# Altium PCB PCB.PcbDoc
Units mm, origin at the board's own origin, x right, y up, seen from the top; angles counter-clockwise.
Board outline 61.59 x 53.09 mm, 2 copper layers (Top Layer, Bottom Layer); 39 components, 25 nets, 145 pads, 23 vias.
Unrouted connection lines stored in the file: 2.
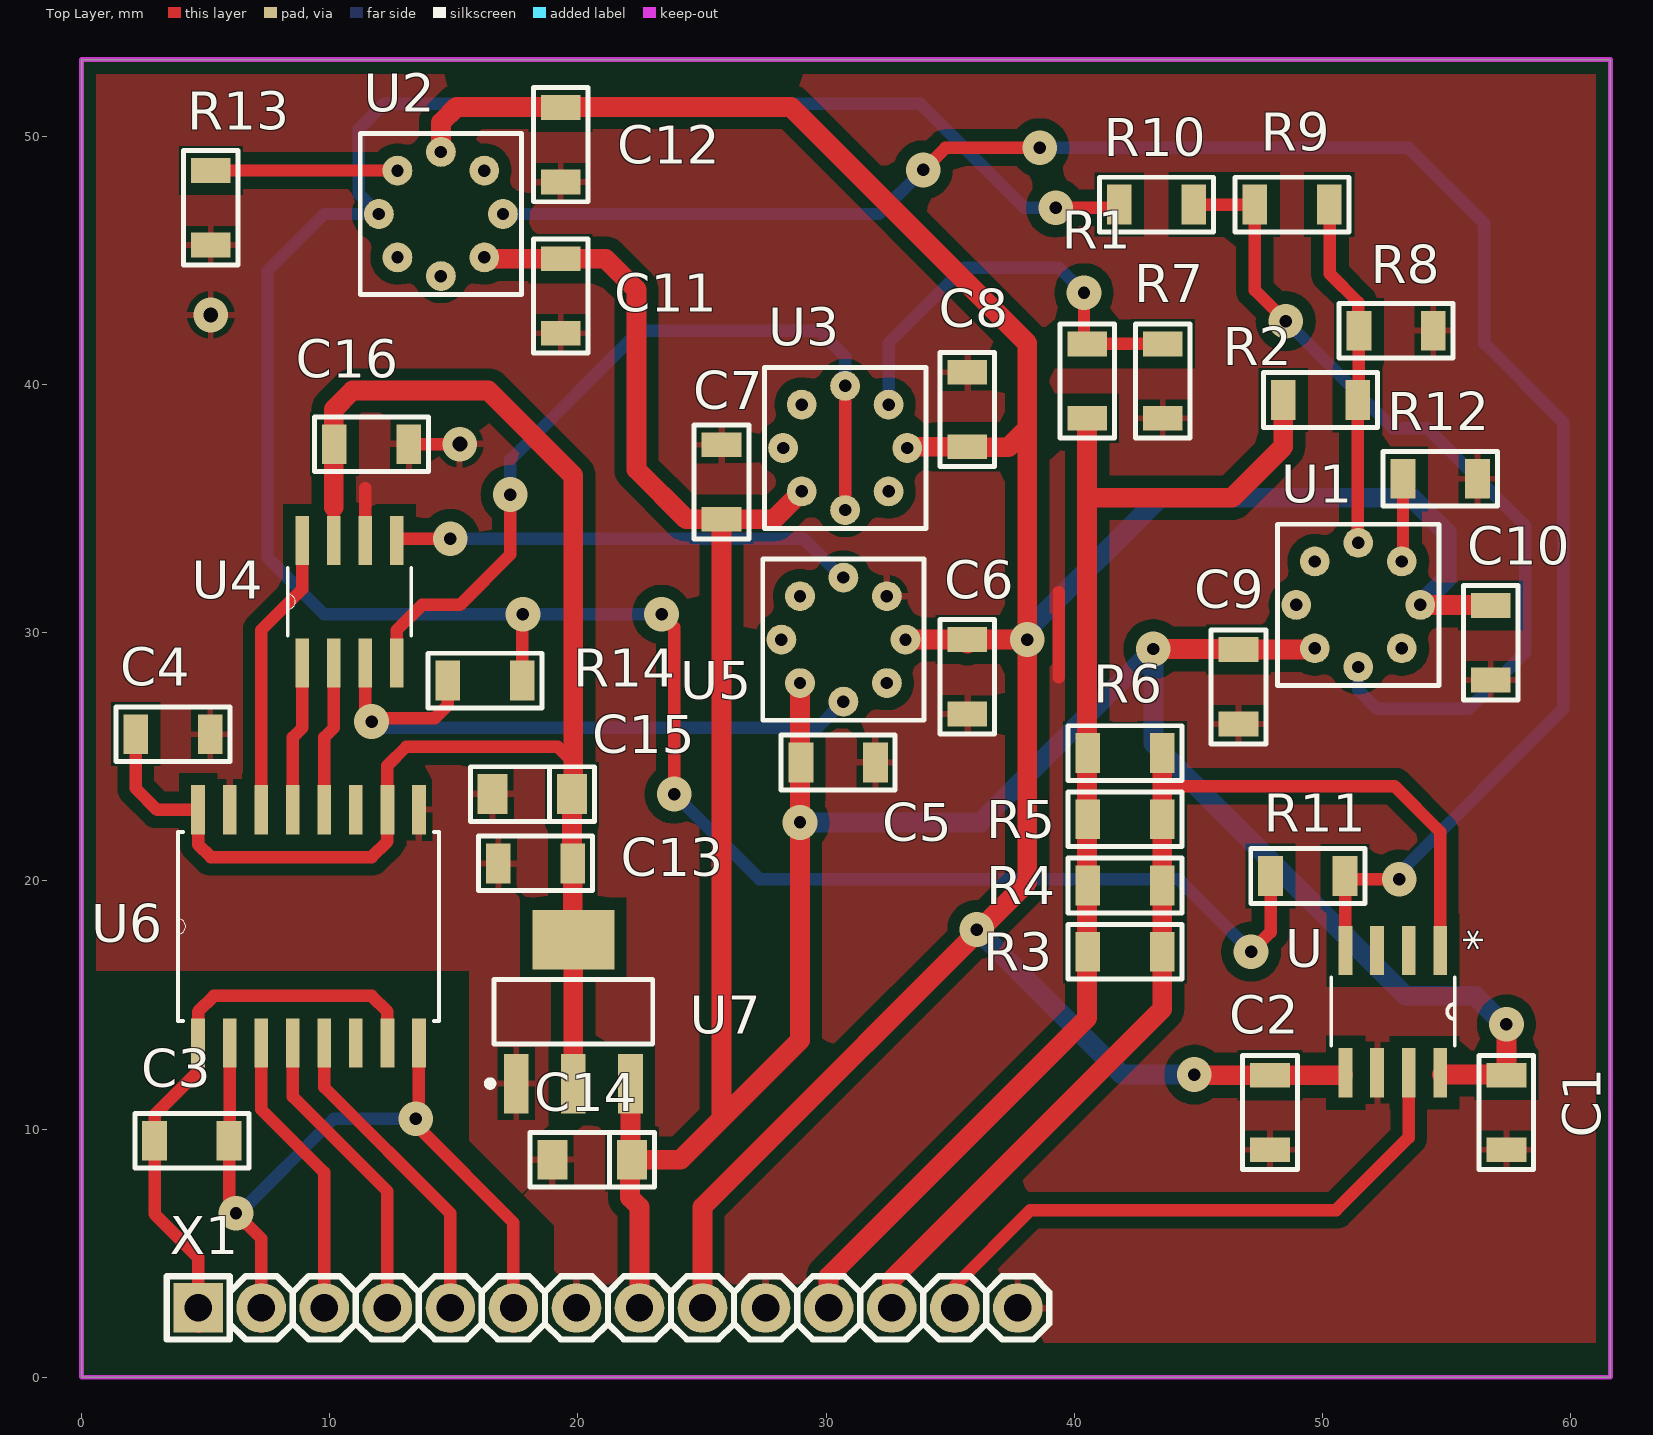
[diagram p0: Top Layer view]
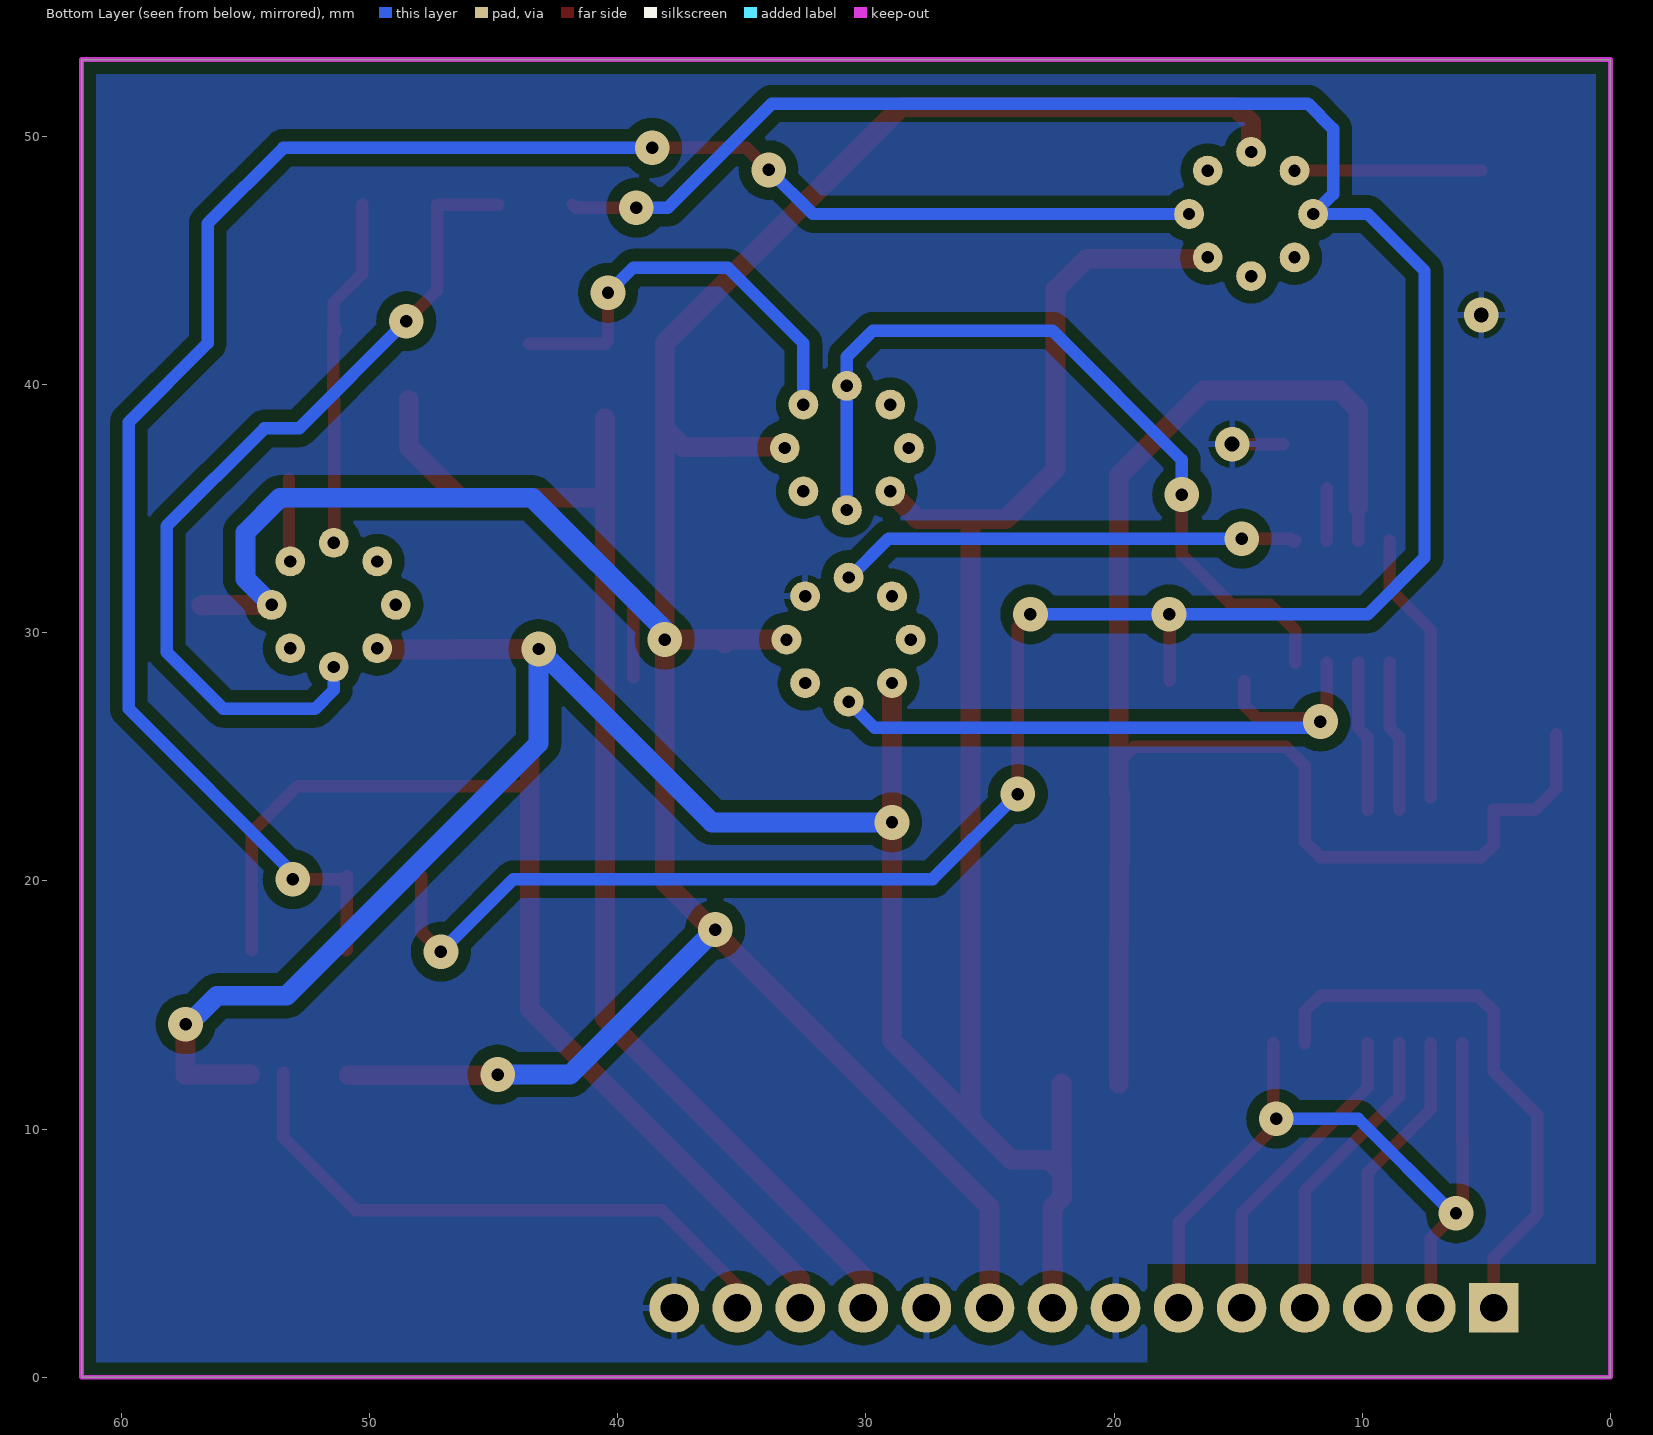
[diagram p1: Bottom Layer view, seen from below]
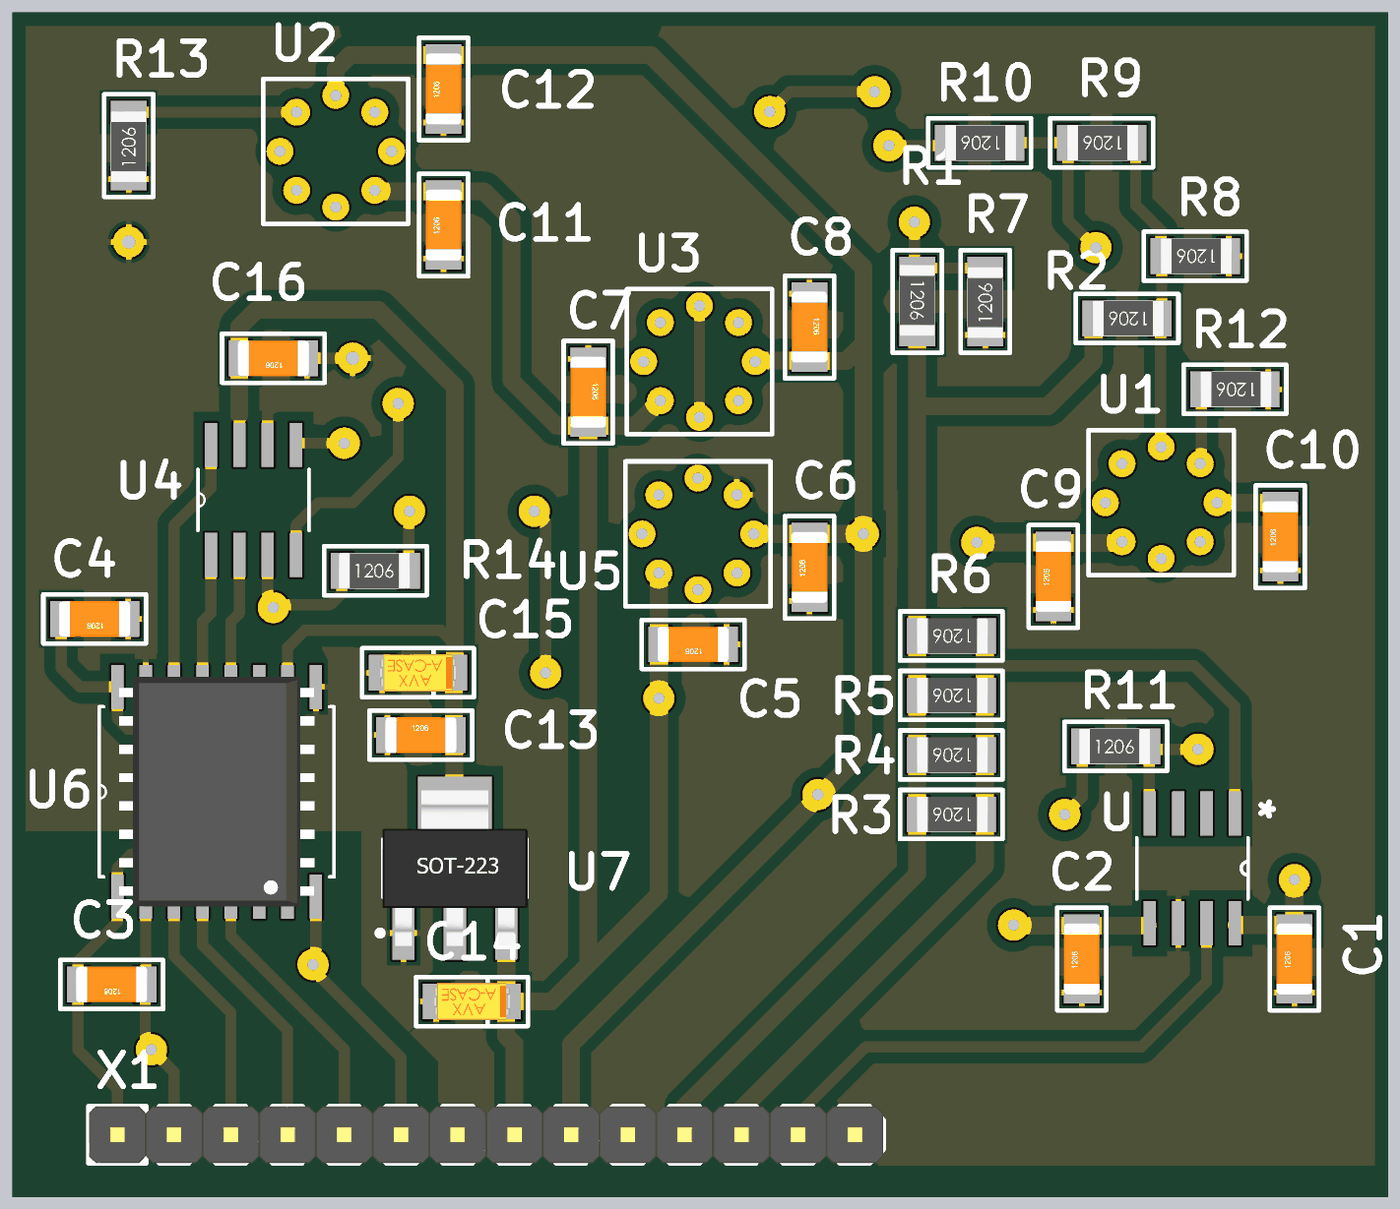
[diagram p2: 3D render of the assembled board from above, using the file's embedded part models]

## Layer stack, top to bottom
Top Solder: solder mask 0.0102, Solder Resist, Dk 3.5
Top Layer: signal copper 0.0356
Dielectric 1: dielectric 0.32, FR-4, Dk 4.8
Bottom Layer: signal copper 0.0356
Bottom Solder: solder mask 0.0102, Solder Resist, Dk 3.5

## Board outline
0,0 0,53.086 61.595,53.086 61.595,0

## Design rules (kind name [scope] priority, off if disabled: settings)
Clearance [All] p1: gap=0.254 ignorepadtopadclearanceinfootprint=TRUE except(0: Arc-Hole Track-Hole SMDPad-Hole THPad-Hole Via-Hole Fill-Hole Poly-Hole Region-Hole Text-Hole; 0.5: Arc-Fill Arc-Poly Arc-Region Track-Fill Track-Poly Track-Region SMDPad-Fill SMDPad-Poly SMDPad-Region THPad-Fill THPad-Poly THPad-Region Via-Fill Via-Poly Via-Region Fill-Fill Fill-Poly Fill-Region Poly-Poly Poly-Region Region-Region)
PolygonConnect [All] p1: connectstyle=Relief reliefconductorwidth=0.254 reliefentries=4 polygonreliefangle="90 Angle" airgapwidth=0.254
RoutingVias [All] p1: holewidth=0.711 width=1.27 viastyle="Through Hole" minholewidth=0.711 minwidth=1.27 maxholewidth=0.711 maxwidth=1.27
SolderMaskExpansion [All] p1: expansion=0.102
Width [All] p1: maxlimit=2 minlimit=0.4 preferedwidth=0.5
30 further rules are at their usual default settings.

## Components (designator, comment, footprint, x,y, rotation, side; value= is the part's Value field where it differs from the comment)
C1 "0.1uF" CH1206C 57.404,10.668 r90 top
C2 "0.1uF" CH1206C 47.879,10.668 r90 top
C3 "0.1uF" CH1206C 4.445,9.525 r180 top
C4 "0.1uF" CH1206C 3.683,25.908 r180 top
C5 "0.1uF" CH1206C 30.48,24.765 r180 top
C6 "0.1uF" CH1206C 35.687,28.218 r90 top
C7 "0.1uF" CH1206C 25.781,36.068 r270 top
C8 "0.1uF" CH1206C 35.687,38.989 r270 top
C9 "0.1uF" CH1206C 46.609,27.813 r90 top
C10 "0.1uF" CH1206C 56.769,29.591 r90 top
C11 "0.1uF" CH1206C 19.304,43.561 r90 top
C12 "0.1uF" CH1206C 19.304,49.657 r90 top
C13 "0.1uF" CH1206C 18.288,20.701 r0 top
C14 "10uF" TANTAL_A 20.574,8.763 r180 top
C15 "10uF" TANTAL_A 18.161,23.495 r180 top
C16 "0.1uF" CH1206C 11.684,37.592 r180 top
R1 "*" CH1206R 40.513,40.132 r270 top
R2 "*" CH1206R 49.911,39.37 r180 top
R3 "*" CH1206R 42.037,17.145 r180 top
R4 "*" CH1206R 42.037,19.812 r180 top
R5 "*" CH1206R 42.037,22.479 r180 top
R6 "*" CH1206R 42.037,25.146 r180 top
R7 "*" CH1206R 43.561,40.132 r90 top
R8 "*" CH1206R 52.959,42.164 r180 top
R9 "*" CH1206R 48.768,47.244 r180 top
R10 "*" CH1206R 43.307,47.244 r180 top
R11 "*" CH1206R 49.403,20.193 r0 top
R12 "*" CH1206R 54.737,36.195 r180 top
R13 "*" CH1206R 5.207,47.117 r90 top
R14 "*" CH1206R 16.256,28.067 r0 top
U "AD8221BR" SOIC127P600X175-8N 52.832,14.732 r270 top
U1 "140УД17А" 140УД17А 51.435,31.115 r90 top
U2 "140УД17А" 140УД17А 14.478,46.863 r180 top
U3 "140УД17А" 140УД17А 30.762,37.437 r90 top
U4 "AD5543BRZ" SOIC127P600X175-8N 10.795,31.242 r90 top
U5 "140УД17А" 140УД17А 30.694,29.718 r90 top
U6 "ADUM1401BRWZ-RL" SOIC127P1032X265-16N 9.144,18.161 r90 top
U7 "Linear voltage regulator, input 3.9...18V, 0.6V, output 3.3V, 1.2A, -40...+85°C, SOT223" SOT223 19.812,14.732 r90 top
X1 "*" "CON: PLS-14" 21.209,2.794 r0 top

## Footprints (in the part's own frame and the unit in brackets; to place one, negate y for a bottom-side part, rotate by r counter-clockwise, add the part's x,y. Pads: shape width x height; smd on the part's side, far side on the other; paste and mask are expansions set on the pad)
140УД17А [mm] "Precision Op Amp"
  round 1.2 hole 0.5: 1(0,2.5) 2(1.75,1.75) 3(2.5,0) 4(1.75,-1.75) 5(0,-2.5) 6(-1.75,-1.75) 7(-2.5,0) 8(-1.75,1.75)
  silkscreen extent -3.25,-3.25 3.25,3.25
CH1206C [mm] "Non polar chip capacitor, size 1206"
  rect 1x1.6 smd: 1(-1.5,0) 2(1.5,0)
  silkscreen extent -2.3,-1.1 2.3,1.1, body extent -1.6,-0.8 1.6,0.8, height 1
CH1206R [mm] "Chip Resistor, 2-Leads, Body 3,0x1,5mm, IPC Low Density"
  rect 1x1.6 smd: 1(-1.5,0) 2(1.5,0)
  silkscreen extent -2.3,-1.1 2.3,1.1, body extent -1.65,-0.8 1.55,0.8, height 0.47
"CON: PLS-14" [mm]
  rect 2x2 hole 1.1: 1(-16.51,0)
  round 2 hole 1.1: 2(-13.97,0) 3(-11.43,0) 4(-8.89,0) 5(-6.35,0) 6(-3.81,0) 7(-1.27,0) 8(1.27,0) 9(3.81,0) 10(6.35,0) 11(8.89,0) 12(11.43,0) 13(13.97,0) 14(16.51,0)
  silkscreen extent -17.78,-1.27 17.78,1.27, body extent -17.78,-1.27 17.78,1.27, height 8.54
SOIC127P600X175-8N [mil]
  rect 78x22 smd: 1(-97,75) 2(-97,25) 3(-97,-25) 4(-97,-75) 5(97,-75) 6(97,-25) 7(97,25) 8(97,75)
  silkscreen extent -54,-98 54,98
SOIC127P1032X265-16N [mil]
  rect 78x22 smd: 1(-185,175) 2(-185,125) 3(-185,75) 4(-185,25) 5(-185,-25) 6(-185,-75) 7(-185,-125) 8(-185,-175) 9(185,-175) 10(185,-125) 11(185,-75) 12(185,-25) 13(185,25) 14(185,75) 15(185,125) 16(185,175)
  silkscreen extent -150,-207 150,207, body extent -203,-203 203,203, height 46
SOT223 [mm] "SOT223, 4-Leads, Body 6,50x7,00mm (avg), Pitch 2,30mm, IPC Medium Density"
  rect 2.4x1 smd: 1(-2.9,2.3) 2(-2.9,0) 3(-2.9,-2.3)
  rect 2.4x3.3 smd: 4(2.9,0)
  round 0.5 on Mech1: ""(-3,2.7)
  silkscreen extent -3.02,-3.2 1.3,3.47, body extent -3.48,-3.25 3.48,3.25, height 1.65
TANTAL_A [mm]
  rect 1.2x1.6 smd: 1(-1.6,0) 2(1.6,0)
  round 0.5 on Mech1: ""(-1.2,0.4)
  silkscreen extent -2.5,-1.1 2.5,1.1, body extent -1.7,-0.84 1.7,0.84, height 1.71

## Part data
C1 C2 C3 C4 C5 C6 C7 C8 C9 C10 C11 C12 C13 C16: library part Capacitor
C14 C15: library part TantalCap
R1 R2 R3 R4 R5 R6 R7 R8 R9 R10 R11 R12 R13 R14: library part Resistor
U: "Instrumentation Amplifier 1 Circuit 8-SOIC", Package="SOIC-8 Analog Devices", Availability=Unavailable, MF="Analog Devices", MP=AD8221BR, Price=None, SnapEDA_Link=https://www.snapeda.com/parts/AD8221BR/Analog%20Devices%20Inc./view-part/82856/?ref=snap
U1 U2 U3 U5: "Precision Op Amp"
U4: "16 Bit Digital to Analog Converter 1 8-SOIC", Package="SOIC-8 Analog Devices", Availability=Good, Check_prices=https://www.snapeda.com/parts/AD5543BRZ/Analog%20Devices%20Inc./view-part/278340/?ref=eda, MF="Analog Devices", MP=AD5543BRZ, Price=None, Purchase-URL=https://pricing.snapeda.com/search/part/AD5543BRZ/?ref=eda, SnapEDA_Link=https://www.snapeda.com/parts/AD5543BRZ/Analog%20Devices%20Inc./view-part/278340/?ref=snap
U6: "General Purpose Digital Isolator 2500Vrms 4 Channel 10Mbps 25kV/Aµs CMTI 16-SOIC (0.295, 7.50mm Width)", Package="SOIC -16 Analog Devices", Availability=Good, Check_prices=https://www.snapeda.com/parts/ADUM1401BRWZ-RL/Analog%20Devices%20Inc./view-part/284352/?ref=eda, MF="Analog Devices", MP=ADUM1401BRWZ-RL, Price=None, Purchase-URL=https://pricing.snapeda.com/search/part/ADUM1401BRWZ-RL/?ref=eda, SnapEDA_Link=https://www.snapeda.com/parts/ADUM1401BRWZ-RL/Analog%20Devices%20Inc./view-part/284352/?ref=snap
U7: library part LDL1117S33R, "Linear voltage regulator", CurrentOutput=1.2A, Manufacturer=STMicroelectronics, Package=SOT223, PartNumber=LM1117GS-5.0, Temperature=-40...+85°C, VoltageInput="input 3.9...18V", VoltageOutput="output 3.3V", ComponentType="Linear voltage regulator", HelpURL=https://www.digikey.com/product-detail/en/stmicroelectronics/LDL1117S33R/497-17239-1-ND/7102079, MaxDropout=0.6V, ValueManufacturerPartNumber="Linear voltage regulator, input 3.9...18V, 0.6V, output 3.3V, 1.2A, -40...+85°C, SOT223"
X1: library part 14-Connector

## Via types
v1: diameter 1.4, hole 0.5, Top Layer to Bottom Layer, 21 vias
v2: diameter 1.4, hole 0.6, Top Layer to Bottom Layer, 2 vias

## Nets (pads, with @x,y where several pads share a name; then routed paths per layer and width w, separated by ;. In a path a pad name is that pad's centre, name@x,y a point inside that pad or via, vN(x,y) a via of type N, cw(c..) or ccw(c..) an arc to the next point about the centre after c; other vN are vias at no path point)
+5V_A: C4.2 C13.2 C15.1 C16.2 U4.7 U6.10 U6.16 U7.2 U7.4 | length 66.9
  Top Layer w0.5: C4.2 2.183,23.725 3.048,22.86 U6.16 4.699,21.463 5.207,20.955 11.684,20.955 12.319,21.59 U6.10 12.319,24.638 13.081,25.4 19.177,25.4 19.812,24.765 ; U4.7 10.16,35.052 ; C13.2@19.761,20.728 C13.2 ; C15.1 C15.1@19.812,23.546 ; U7.4@19.788,17.656 U7.4
  Top Layer w0.8: 10.16,35.052 10.16,38.989 10.922,39.751 16.383,39.751 19.812,36.322 19.812,24.765 C15.1@19.812,23.546 ; C13.2@19.761,20.728 C15.1 ; U7.4@19.788,17.656 C13.2 ; U7.2 U7.4
+5V_D: C3.2 U6.1 U6.7 X1.1 | length 23.6
  Top Layer w0.5: X1.1@4.699,2.032 X1.1 4.699,4.826 2.945,6.58 C3.2 2.945,10.565 4.699,12.319 U6.1 4.699,14.732 5.334,15.367 11.684,15.367 12.319,14.732 U6.7
+15V: C1.2 C5.2 C7.2 C9.2 C11.2 C14.1 U1.8 U2.8 U3.8 U5.8 U7.3 U.8 X1.8 | length 129.7
  Top Layer w0.5: U2.8 U2.8@16.28,45.061 ; C1.2@57.38,12.192 C1.2
  Top Layer w0.8: U2.8@16.28,45.061 C11.2 21.106,45.061 22.352,43.815 22.352,36.576 24.36,34.568 C7.2 ; U7.3 22.112,8.269 22.098,8.283 22.098,7.239 22.479,6.858 X1.8 ; C14.1@22.225,8.382 22.606,8.763 24.13,8.763 25.781,10.414 ; U5.8 v1(28.944,22.352) 28.944,13.577 25.781,10.414 ; U3.8 27.893,34.568 C7.2 ; v1(43.18,29.337) 46.585,29.337 C9.2 49.633,29.313 U1.8 ; U.8@54.813,12.192 C1.2@57.38,12.192 ; C1.2 v1(57.404,14.224) ; 25.781,10.414 C7.2
  Bottom Layer w0.8: v1(28.944,22.352) 36.195,22.352 v1(43.18,29.337) 43.18,25.527 53.34,15.367 56.134,15.367 57.404,14.097 v1(57.404,14.224)
-15V: C2.2 C6.2 C8.2 C10.2 C12.2 U1.5 U2.5 U3.5 U5.5 U.5 X1.9 | length 126.8
  Top Layer w0.5: U2.5 U2.5@14.502,49.387 ; C8.2 C8.2@35.711,37.465
  Top Layer w0.8: U2.5 14.478,50.546 15.113,51.181 28.575,51.181 38.1,41.656 38.1,38.227 ; X1.9 25.019,6.858 38.1,19.939 v1(38.1,29.718) ; U5.5 C6.2 ; U3.5 33.314,37.489 C8.2 ; C6.2@35.687,29.567 35.838,29.718 v1(38.1,29.718) ; C8.2@35.711,37.465 37.338,37.465 38.1,38.227 ; v1@44.982,12.168 C2.2 U.5@50.827,12.168 ; U1.5 56.745,31.115 C10.2 ; v1(38.1,29.718) 38.1,38.227
  Bottom Layer w0.8: v1(36.068,18.034) 41.91,12.192 v1(44.831,12.192) ; v1(38.1,29.718) 38.1,30.099 43.434,35.433 53.594,35.433 54.991,34.036 54.991,32.171 U1.5
GND_A: C1.1 C2.1 C4.1 C5.1 C6.1 C7.1 C8.1 C9.1 C10.1 C11.1 C12.1 C13.1 C14.2 C15.2 C16.1 R7.1 R8.1 R12.1 R13.1 U4.6 U5.4 U6.9 U6.15 U7.1 U.6 X1.7 X1.10 X1.14 | length 7.6
  Top Layer w0.5: U4.6 11.43,35.814 ; C16.1 v2(15.24,37.592) ; 39.37,28.194 39.37,31.623
  other v2: 5.207,42.799
GND_D: C3.1 U6.2 U6.8 X1.2 X1.6 | length 33.8
  Top Layer w0.5: U6.2 5.969,9.549 C3.1 5.945,6.882 v1(6.223,6.604) 7.239,5.588 X1.2 X1.2@7.239,2.032 ; U6.8 13.589,10.033 17.399,6.223 X1.6 X1.6@17.399,2.032
  Bottom Layer w0.5: v1(6.223,6.604) 6.35,6.604 10.16,10.414 v1(13.462,10.414)
NetR1_1: R1.1 R7.2 U3.4 | length 17.2
  Top Layer w0.5: v1(40.386,43.688) 40.386,41.759 R1.1 R7.2
  Bottom Layer w0.5: U3.4 32.512,41.656 35.56,44.704 39.37,44.704 v1(40.386,43.688)
NetR2_1: R2.1 R8.2 R9.1 U1.3 | length 14.2
  Top Layer w0.5: R9.1@50.292,47.244 50.292,44.45 51.435,43.307 51.435,42.267 R8.2@51.332,42.164 ; U1.3 51.411,33.639 R2.1 51.459,39.418 R8.2
NetR3_1: R3.1 R4.1 R5.1 R6.1 U.1 X1.12 | length 43.6
  Top Layer w0.5: 43.537,23.812 52.895,23.812 54.737,21.971 U.1
  Top Layer w0.8: X1.12 32.639,3.937 43.537,14.835 R3.1 R4.1 R5.1 43.537,23.812 R6.1
NetR9_2: R9.2 R10.1 U1.7 | length 34.7
  Top Layer w0.5: R10.1 R9.2 47.268,43.791 v1(48.514,42.545)
  Bottom Layer w0.5: v1(48.514,42.545) 52.832,38.227 54.229,38.227 58.166,34.29 58.166,29.21 55.88,26.924 52.197,26.924 51.435,27.686 U1.7
NetR10_2: R10.2 R11.1 R14.2 U2.3 | length 109.7
  Top Layer w0.5: R14.2 17.756,30.583 v1@17.78,30.607 ; v1(23.368,30.734) 23.876,30.226 v1(23.876,23.495) ; v1(39.243,47.117) 41.68,47.117 R10.2 ; v1(47.117,17.145) 47.903,17.931 R11.1
  Bottom Layer w0.5: v1(23.368,30.734) v1(17.78,30.734) 9.779,30.734 7.493,33.02 7.493,44.577 9.779,46.863 U2.3 11.176,47.665 11.176,50.292 12.192,51.308 33.782,51.308 37.973,47.117 v1(39.243,47.117) ; v1@23.812,23.431 23.939,23.431 27.305,20.066 44.196,20.066 v1(47.117,17.145)
NetR11_2: R11.2 U2.7 U.4 | length 77.6
  Top Layer w0.5: v1(33.909,48.641) 34.798,49.53 v1(38.608,49.53) ; U.4 50.903,17.22 R11.2 51.03,20.066 v1(53.086,20.066)
  Bottom Layer w0.5: U2.7 32.131,46.863 v1(33.909,48.641) ; v1(38.608,49.53) 53.467,49.53 56.515,46.482 56.515,41.656 59.69,38.481 59.69,26.924 53.086,20.32 v1(53.086,20.066)
NetR12_2: R12.2 U1.4 | length 3.4
  Top Layer w0.5: U1.4 53.237,32.917 R12.2
NetR13_2: R13.2 U2.4 | length 7.5
  Top Layer w0.5: R13.2 12.724,48.617 U2.4
NetR14_1: R14.1 U4.3 U5.7 | length 26.8
  Top Layer w0.5: U4.3 11.43,26.797 11.684,26.543 14.224,26.543 14.756,27.075 R14.1
  Bottom Layer w0.5: v1@11.811,26.797 11.811,26.035 11.938,26.162 29.638,26.162 U5.7
  other v1: 11.684,26.416
NetU3_3: U3.3 U3.7 U4.4 | length 38.2
  Top Layer w0.5: U4.4 12.7,30.099 13.716,31.115 15.24,31.115 17.272,33.147 v1(17.272,35.56) ; U3.7 U3.3
  Bottom Layer w0.5: v1(17.272,35.56) 17.272,36.957 22.479,42.164 29.718,42.164 30.762,41.12 U3.3 U3.7
NetU4_1: U4.1 U6.13 | length 6.1
  Top Layer w0.5: U6.13 8.509,25.781 8.89,26.162 U4.1
NetU4_2: U4.2 U6.12 | length 6.1
  Top Layer w0.5: U6.12 9.779,25.781 10.16,26.162 U4.2
NetU4_5: U4.5 U5.3 | length 18.7
  Top Layer w0.5: U4.5 12.751,33.655 12.878,33.782 v1(14.859,33.782)
  Bottom Layer w0.5: v1(14.859,33.782) 29.083,33.782 30.647,32.218 U5.3
NetU4_8: U4.8 U6.14 | length 11
  Top Layer w0.5: U6.14@7.239,23.368 7.239,30.099 8.89,31.75 U4.8
SPI_CS: U6.3 X1.3 | length 12.5
  Top Layer w0.5: U6.3 7.239,10.795 9.779,8.255 X1.3 X1.3@9.779,2.032
SPI_MOSI: U6.5 X1.5 | length 13.5
  Top Layer w0.5: U6.5 9.779,11.684 14.859,6.604 X1.5 X1.5@14.859,2.032
SPI_SCK: U6.4 X1.4 | length 13
  Top Layer w0.5: U6.4 8.509,11.303 12.319,7.493 X1.4 X1.4@12.319,2.032
Ud: U.7 X1.13 | length 25
  Top Layer w0.5: X1.13@35.179,2.032 X1.13 35.179,3.683 38.227,6.731 50.546,6.731 53.467,9.652 U.7
Um: R1.2 R2.2 R3.2 R4.2 R5.2 R6.2 X1.11 | length 58.8
  Top Layer w0.5: R3.2 R4.2 R5.2 R6.2
  Top Layer w0.8: X1.11 30.099,4.064 40.513,14.478 40.513,22.479 40.513,35.433 ; R1.2 40.513,35.433 ; R2.2 48.411,37.489 46.355,35.433 40.513,35.433
pads on no net: C14. C15. U1.1 U1.2 U1.6 U2.1 U2.2 U2.6 U3.1 U3.2 U3.6 U5.1 U5.2 U5.6 U6.6 U6.11 U7. U.2 U.3

## Polygon pours and split planes (outlines as drawn)
GND_A on Top Layer "TL" (solid, pour order 0): 0,53.086 61.595,53.086 61.595,1.397 0,1.397
GND_A on Bottom Layer "BL" (solid, pour order 2): 0,53.086 61.595,53.086 61.595,0 0,0

## Keep-outs
Keep-Out Layer:
  the board outline again, w0.2

## Other copper
Top Layer:
  pour cut-out: 0.381,16.383 15.621,16.383 15.621,9.525 19.05,6.096 19.05,2.201 19.05,0 0.381,0
  pour cut-out: 23.241,8.128 23.368,8.001 24.638,8.001 24.638,3.81 23.876,3.048 23.622,3.048 22.987,3.683 23.114,3.81 23.114,8.128
  pour cut-out: 13.081,32.639 9.525,32.639 8.636,31.75 8.636,30.099 8.763,29.972 12.192,29.972 12.192,30.226 13.716,31.75
  pour cut-out: 13.97,48.641 14.478,48.133 15.875,48.133 15.875,47.244 16.383,46.736 15.367,45.72 15.367,45.339 13.589,45.339 13.462,45.212 12.573,46.101 12.573,47.625 13.589,48.641
  pour cut-out: 30.734,31.496 31.75,31.496 32.766,30.48 32.766,28.956 31.623,27.813 29.591,27.813 28.448,28.956 28.448,30.734 29.464,31.75 30.48,31.75
  pour cut-out: 52.324,32.893 53.467,31.75 53.34,31.623 53.34,30.099 52.959,30.099 51.943,29.083 51.308,29.718 49.784,29.718 49.784,30.353 49.403,30.734 49.53,30.861 49.53,32.258 49.784,32.258 50.419,32.893
  pour cut-out: 18.923,35.56 18.161,34.798 17.526,34.798 17.526,32.766 17.145,32.385 17.526,32.004 19.431,32.004 19.431,34.798 19.304,34.925
  pour cut-out: 13.589,30.48 14.478,31.369 16.51,31.369 16.51,30.607 17.399,29.718 17.272,29.591 17.272,28.321 18.796,26.797 18.796,25.908 15.113,25.908 15.367,26.162 15.367,28.956 13.335,28.956 13.208,29.083
  pour cut-out: 26.289,29.591 26.289,12.954 27.305,12.954 28.321,13.97 28.321,28.829 27.178,29.972
  pour cut-out: 41.148,14.478 41.275,14.605 42.672,14.605 42.672,25.908 42.799,26.035 42.799,26.416 41.148,26.416
Bottom Layer:
  pour cut-out: 29.972,31.496 30.226,31.75 31.75,31.75 32.893,30.607 32.512,30.226 32.512,28.829 32.385,28.829 31.369,27.813 29.972,27.813 28.702,29.083 28.702,30.988 29.21,31.496
  pour cut-out: 30.48,39.37 30.734,39.116 32.258,39.116 32.258,38.354 32.893,37.719 32.131,36.957 32.131,36.068 31.242,36.068 30.734,35.56 30.48,35.814 29.464,35.814 29.464,36.195 28.702,36.957 29.464,37.719 29.464,39.116
  pour cut-out: 13.462,48.895 15.621,48.895 16.764,47.752 16.764,45.72 15.407,44.363 13.549,44.363 12.319,45.593 12.319,47.879
  pour cut-out: 50.419,32.893 52.832,32.893 53.848,31.877 53.848,29.718 52.578,28.448 50.165,28.448 49.276,29.337 49.276,32.258
  pour cut-out: 0,4.572 18.669,4.572 18.669,0 0,0

## Silkscreen, mask and mechanical layers (free items; w line width, h text height)
Size:
  lines w0.254: -0.041,-3.785 -0.041,-3.277 ; 1.483,-4.039 -0.041,-3.531 ; 1.483,-3.023 -0.041,-3.531 ; 22.86,-3.531 -0.041,-3.531 ; 38.654,-3.531 61.554,-3.531 ; 60.03,-4.039 61.554,-3.531 ; 60.03,-3.023 61.554,-3.531 ; 61.554,-3.785 61.554,-3.277
  text "61.595 (mm)" at 23.114,-4.445 h1.52

## Dimensions
61.595,0 to 61.595,53.086 on Size

## Text inside footprints (layer, text, board x,y; h text height)
U: Top Overlay "*" at 55.172,18.039 h1.27 r270; Mechanical 13 "*" at 55.172,18.038 h1.27 r270
U6: Mechanical 13 "*" at 4.255,12.636 h1.27 r90